# EAGLE board cosv-carrier-teensy40 (EAGLE 9.6.2)
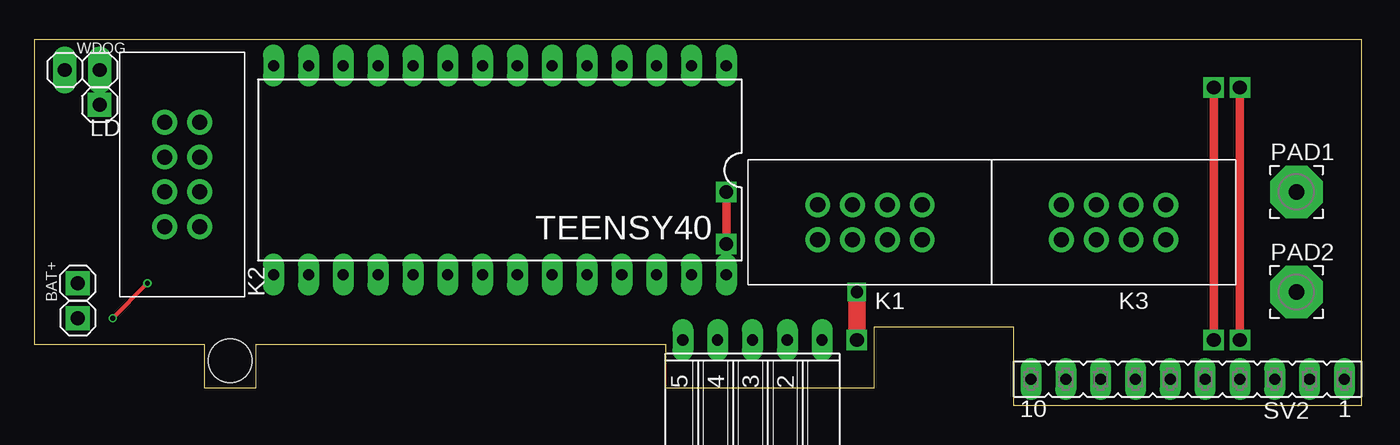
[diagram p0: board, top side]
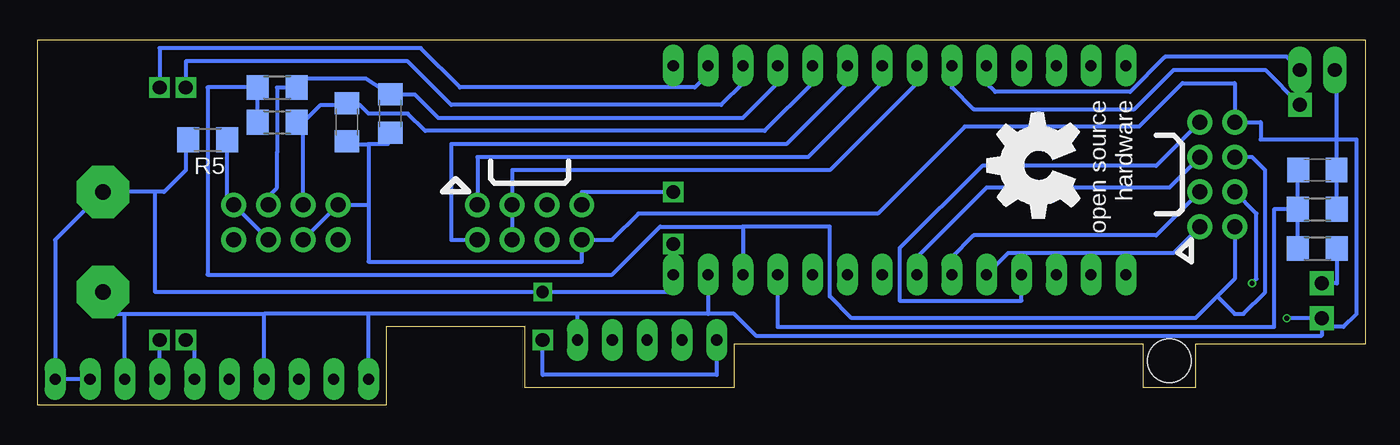
[diagram p1: board, bottom side, seen from below]

Size 96.84 x 26.67 mm. Coordinates in mm from the lower left corner, seen from the top.
Copper layers (1*16): Top 0.035559375mm / dielectric 1.6mm / Bottom 0.035559375mm
Design rules "oshpark-2layer *": minimum track width 10mil, minimum drill 10mil, track to track 12mil, track to pad 12mil, pad to pad 12mil, via to via 12mil, smd to smd 5mil, copper to edge 15mil, drill to drill 6mil, minimum pad ring 14mil, minimum via ring 5mil, stop-mask expansion 2.5mil, vias tented up to drill 0mil, thermal gap 10mil
Holes 3.2 mm at 14.29,3.25

## Footprints (pad centres in the part's own frame; a part is rotated, then mirrored left to right if it is on the bottom)
1X01-S = drill 1.016 square: 1 0,0
C1206 = smd 1.6 x 1.8: 1 -1.4,0; 2 1.4,0
61200821621 = drill 1.1: 1 -2.54,-1.27; 2 -2.54,1.27; 3 0,-1.27; 4 0,1.27; 5 2.54,-1.27; 6 2.54,1.27; 7 5.08,-1.27; 8 5.08,1.27
3,81/1,1 = drill 1.118 pad 3.81 octagon: 1 0,0
R1206 = smd 1.6 x 1.803: 1 -1.422,0; 2 1.422,0
FE10 = drill 0.813 long: 1 -11.43,0; 2 -8.89,0; 3 -6.35,0; 4 -3.81,0; 5 -1.27,0; 6 1.27,0; 7 3.81,0; 8 6.35,0; 9 8.89,0; 10 11.43,0
FE05W = drill 0.813 long: 1 -5.08,0; 2 -2.54,0; 3 0,0; 4 2.54,0; 5 5.08,0
DIL28-6 = drill 0.813 long: 1 -16.51,-7.62; 2 -13.97,-7.62; 3 -11.43,-7.62; 4 -8.89,-7.62; 5 -6.35,-7.62; 6 -3.81,-7.62; 7 -1.27,-7.62; 8 1.27,-7.62; 9 3.81,-7.62; 10 6.35,-7.62; 11 8.89,-7.62; 12 11.43,-7.62; 13 13.97,-7.62; 14 16.51,-7.62; 15 16.51,7.62; 16 13.97,7.62; 17 11.43,7.62; 18 8.89,7.62; 19 6.35,7.62; 20 3.81,7.62; 21 1.27,7.62; 22 -1.27,7.62; 23 -3.81,7.62; 24 -6.35,7.62; 25 -8.89,7.62; 26 -11.43,7.62; 27 -13.97,7.62; 28 -16.51,7.62
1X02 = drill 1.016 long: 1 -1.27,0; 2 1.27,0

## Placement (x,y rotation side)
BAT+  [1X01-S]  3.18,8.89 270 top
C1  10nf  [C1206]  3.49,17.15 0 bottom
C2  10nf  [C1206]  71.12,21.27 270 bottom
C3  10nf  [C1206]  74.29,20.64 270 bottom
G  [1X01-S]  3.18,6.35 0 top
GOLD_ORB_SM1  OSHWLOGOLOGO8MM  [OSHW_8MM]  23.81,17.46 90 bottom
K1  61200821621  [61200821621]  62.23,13.33 180 top
K2  61200821621  [61200821621]  10.79,15.56 90 top
K3  61200821621  [61200821621]  80.01,13.33 180 top
LD  [1X01-S]  4.76,21.91 0 top
PAD1  WIREPAD3,81/1,1  [3,81/1,1]  92.07,15.56 0 top
PAD2  WIREPAD3,81/1,1  [3,81/1,1]  92.07,8.25 0 top
R1  100K  [R1206]  3.49,11.43 180 bottom
R2  22K  [R1206]  3.49,14.29 180 bottom
R3  2k2  [R1206]  79.38,20.64 180 bottom
R4  2k2  [R1206]  79.38,23.18 180 bottom
R5  100  [R1206]  84.45,19.37 180 bottom
SV2  [FE10]  84.14,1.91 180 top
SV5  [FE05W]  52.39,4.76 180 top
TEENSY40  [DIL28-6]  33.97,17.15 180 top
WDOG  [1X02]  3.49,24.45 0 top

## Library data of the parts
BAT+ G LD = pinhead-2
C1-C3 = rcl
GOLD_ORB_SM1 = oshw
K1-K3 = Wuerth_Elektronik_eiCan_05_Box_Header_IDC_Connectors_1_2
PAD1 PAD2 = wirepad
R1-R5 = resistor
SV2 SV5 = con-lsta; OC_FARNELL: unknown; OC_NEWARK: unknown
TEENSY40 = ic-package
WDOG = pinhead

## Nets
3V3: K2.2 K2.6 R3.2 R4.2 TEENSY40.26
A_BATTERY: C1.1 R1.2 R2.2 TEENSY40.25
BAT+: BAT+.1 R1.1
ENCODER: C3.1 K3.5 R3.1 TEENSY40.5
GND: C1.2 C2.2 C3.2 G.1 K1.8 K2.4 K2.8 K3.6 K3.7 PAD2.1 R2.1 SV2.3 SV2.7 SV2.10 SV5.1 TEENSY40.27 WDOG.1
HOME: C2.1 K3.3 R4.1 TEENSY40.4
L_EN: K1.1 TEENSY40.7
LINE_DETECT: LD.1 TEENSY40.9
N$1: K3.1 K3.4 R5.1
PULSER: TEENSY40.10 WDOG.2
PWM: K1.3 K1.4 TEENSY40.8
R_EN: K1.2 TEENSY40.6
RX1: SV2.4 TEENSY40.2
SCL0: K2.5 TEENSY40.21
SCL1: K2.7 TEENSY40.18
SDA0: K2.3 TEENSY40.20
SDA1: K2.1 TEENSY40.19
TX1: SV2.5 TEENSY40.3
VCC: K1.7 PAD1.1 R5.2 SV2.1 SV2.2 SV5.5 TEENSY40.28

## Tracks (layer width: path | path; a pad name or v marks a point on that pad's centre or on a via)
3V3
  Bottom 0.305: 45.4,13.02 39.05,13.02 39.05,7.94 37.47,6.35 12.38,6.35 10.79,7.94 | 45.4,13.02 TEENSY40.26 | 45.4,13.02 51.44,13.02 54.93,9.53 84.46,9.53 84.46,23.18 R4.2 R3.2 | K2.2 9.53,9.21 10.79,7.94 | 10.79,7.94 9.53,6.67 8.89,6.67 7.3,8.25 7.3,17.15 8.26,18.1 K2.6
A_BATTERY
  Bottom 0.305: TEENSY40.25 42.86,5.72 6.67,5.72 6.67,14.29 R2.2 | R1.2 R2.2 | R2.2 4.91,17.12 C1.1
BAT+
  Bottom 0.305: BAT+.1 2.07,8.89 R1.1
ENCODER
  Bottom 0.305: TEENSY40.5 40.32,23.49 43.81,20 68.58,20 69.85,21.27 72.71,21.27 73.34,21.91 74.93,21.91 | 77.47,20.64 R3.1 77.95,20.49 77.47,20.64 | 77.47,20.64 76.2,21.91 74.93,21.91 | C3.1 74.93,21.91 | K3.5 77.47,20.64
GND  (via drill 0.35)
  Top 0.305: v5.71,6.35 v8.26,8.89
  Bottom 0.305: TEENSY40.27 47.94,6.67 | 47.94,6.67 57.47,6.67 | 57.47,6.67 72.71,6.67 | 72.71,6.67 80.33,6.67 | SV2.7 80.33,6.67 | SV2.10 72.71,6.67 | SV5.1 57.47,6.67 | SV2.3 90.49,6.67 | 90.49,6.67 80.33,6.67 | 72.71,14.6 K3.7 K3.6 | 72.71,14.6 72.71,10.48 57.15,10.48 K1.8 54.93,12.06 53.02,13.97 35.56,13.97 29.21,20.32 16.51,20.32 13.34,23.49 9.53,23.49 K2.8 7.62,20.64 7.62,19.37 2.22,19.37 | PAD2.1 92.07,6.67 90.49,6.67 | 3.18,5.72 1.59,5.72 0.64,6.67 0.64,19.37 2.09,19.37 | 47.94,6.67 46.04,6.67 44.45,5.08 3.18,5.08 3.18,5.72 | 2.09,19.37 2.09,24.32 WDOG.1 | 2.09,19.37 2.22,19.37 | R2.1 2.07,17.12 C1.2 2.09,19.24 2.22,19.37 | 3.18,5.72 G.1 v5.71,6.35 | 72.71,19.05 72.71,14.6 | C2.2 71.31,19.05 72.71,19.05 | C3.2 74.74,19.05 72.71,19.05 | v8.26,8.89 7.94,9.21 7.94,13.97 K2.4
HOME
  Bottom 0.305: TEENSY40.4 42.86,23.49 45.4,20.96 67.63,20.96 69.35,22.67 C2.1 72.9,23.81 77.47,23.81 78.1,23.18 | K3.3 80.01,15.24 79.38,15.87 79.38,18.42 79.38,23.18 78.1,23.18 | 78.1,23.18 R4.1
L_EN
  Bottom 0.305: TEENSY40.7 35.24,23.49 40.64,18.1 64.77,18.1 K1.1
LINE_DETECT
  Bottom 0.305: TEENSY40.9 30.16,23.18 28.58,21.59 16.83,21.59 13.97,24.45 7.3,24.45 LD.1
N$1
  Bottom 0.305: R5.1 83.03,15.09 K3.1 K3.4
PULSER
  Bottom 0.305: TEENSY40.10 27.62,23.49 26.99,22.86 17.14,22.86 14.61,25.4 5.71,25.4 WDOG.2
PWM
  Bottom 0.305: K1.4 K1.3 62.23,17.15 39.05,17.15 32.7,23.49 TEENSY40.8
R_EN
  Bottom 0.305: TEENSY40.6 37.78,23.49 42.23,19.05 66.68,19.05 66.68,12.06 K1.2
RX1  (via drill 1)
  Top 0.61: v87.95,4.76 v87.95,23.18
  Bottom 0.305: TEENSY40.2 47.94,24.13 48.9,23.18 66.04,23.18 68.9,26.03 87.95,26.03 v87.95,23.18 | SV2.4 v87.95,4.76
SCL0
  Bottom 0.305: TEENSY40.21 32.7,10.8 27.62,15.87 14.29,15.87 K2.5
SCL1
  Bottom 0.305: TEENSY40.18 25.08,7.62 33.97,7.62 33.97,11.43 27.94,17.46 15.24,17.46 K2.7
SDA0
  Bottom 0.305: TEENSY40.20 30.16,10.8 28.58,12.38 15.24,12.38 K2.3
SDA1
  Bottom 0.305: K2.1 13.97,11.11 26.03,11.11 TEENSY40.19
TX1  (via drill 1)
  Top 0.61: v86.04,4.76 v86.04,23.18
  Bottom 0.305: TEENSY40.3 45.4,23.49 46.99,21.91 66.68,21.91 69.85,25.08 86.04,25.08 v86.04,23.18 | SV2.5 85.41,4.76 v86.04,4.76
VCC  (via drill 0.9, 1)
  Top 0.61: v50.48,15.56 v50.48,11.75
  Top 1.27: v60.01,8.25 v60.01,4.76
  Bottom 0.305: K1.7 57.15,15.56 v50.48,15.56 | v50.48,11.75 TEENSY40.28 50.48,8.25 v60.01,8.25 88.26,8.25 88.26,15.56 | SV5.5 47.31,2.22 60.01,2.22 v60.01,4.76 | SV2.2 SV2.1 95.57,12.06 PAD1.1 88.26,15.56 | R5.2 86.04,19.2 86.04,17.15 87.63,15.56 88.26,15.56

## Text on the board
tValues: gnd | gnd | scl1 | 3v3 | scl0 | gnd | sda0 | vcc | PWM | gnd | enc | home | REN | 3v3 | 3v3 | sda1 | gnd | LEN | PWM | gnd | gnd | vcc
bValues: TEENSY 4.0 Carrier Board for COSV / (c) 2020 Steven Carr and Daren Schwenke | V0.1